# EAGLE board Test_Driver_BLDC (EAGLE 5.06)
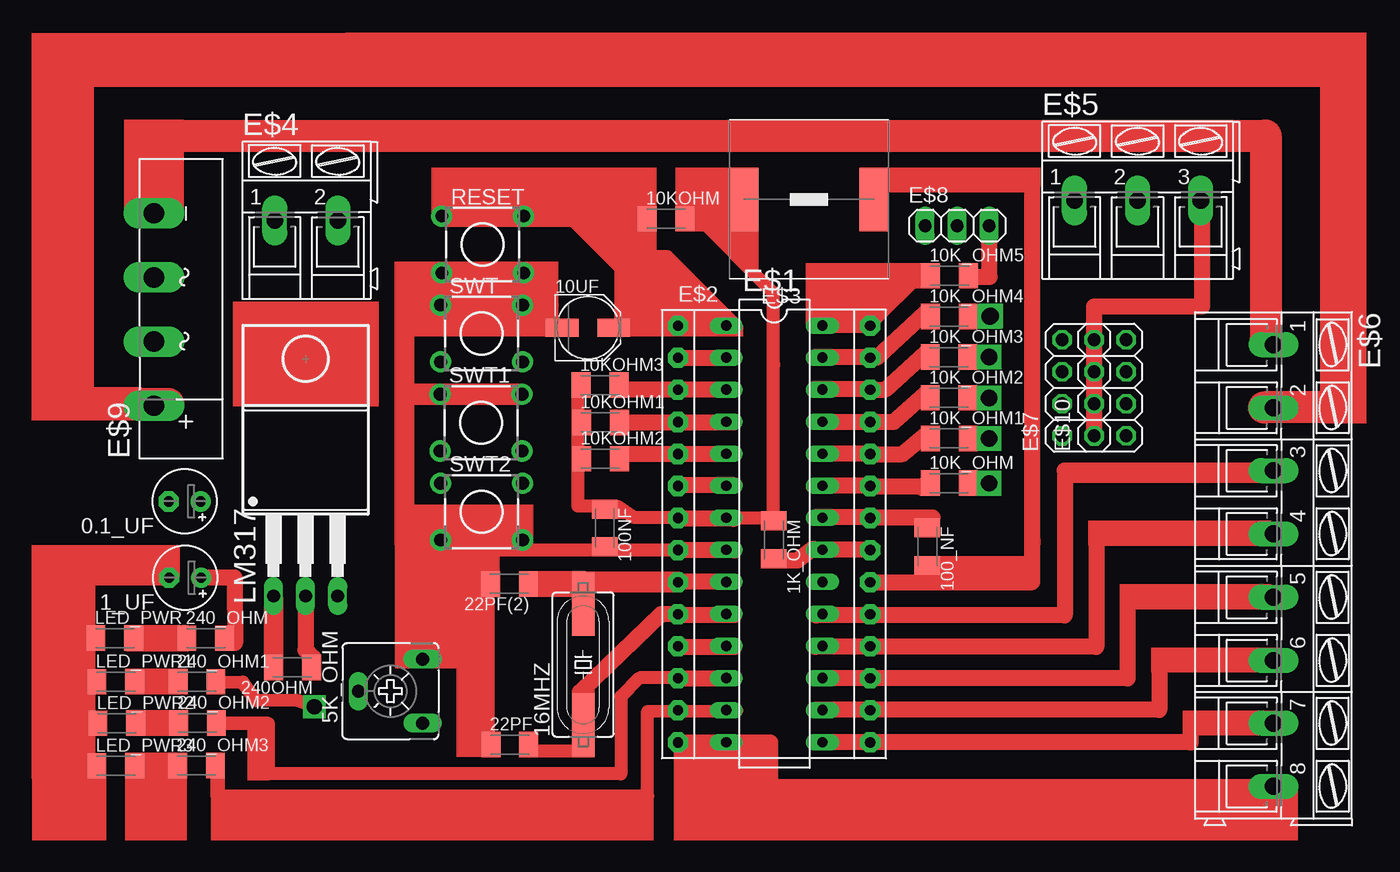
[diagram p0: board, top side]
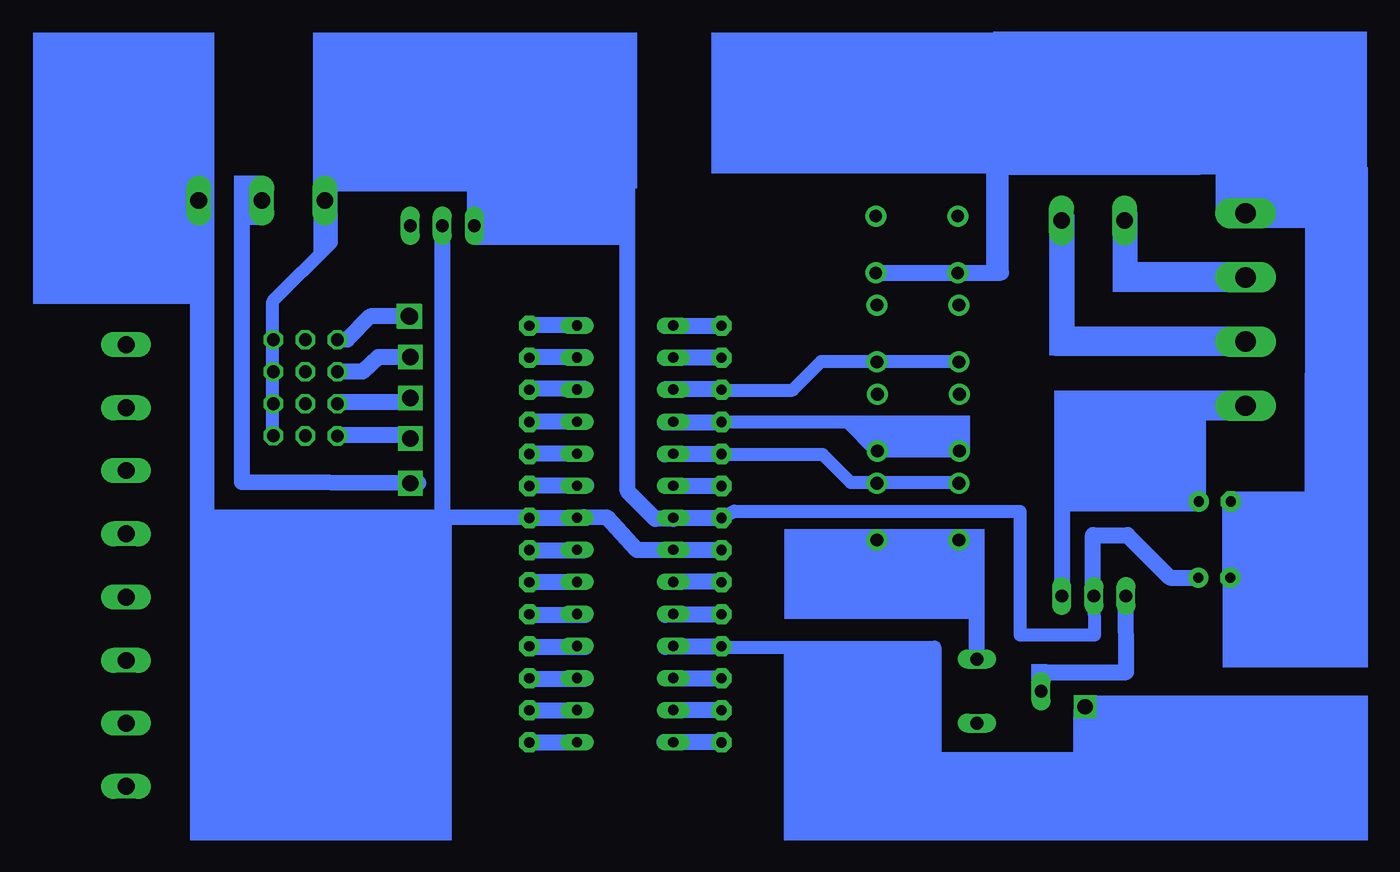
[diagram p1: board, bottom side, seen from below]

No outline drawn. Coordinates in mm, seen from the top.
Copper layers (1*16): Top 0.035mm / dielectric 1.5mm / Bottom 0.035mm
Design rules "default": minimum track width 10mil, minimum drill 24mil, track to track 8mil, track to pad 8mil, pad to pad 8mil, via to via 8mil, smd to smd 8mil, copper to edge 40mil, drill to drill 8mil, minimum pad ring 10mil, minimum via ring 8mil, stop-mask expansion 4mil, vias tented up to drill 0mil, thermal gap 10mil

## Footprints (pad centres in the part's own frame; a part is rotated, then mirrored left to right if it is on the bottom)
E2,5-5 = drill 0.813 pad 1.6 round: + -1.27,0 | drill 0.813 pad 1.6 octagon: - 1.27,0
C1206K = smd 1.5 x 2: 1 -1.5,0; 2 1.5,0
CA6V = drill 1.016 long: A -2.54,-2.54; E 2.54,-2.54; S 0,2.54
PANASONIC_C = smd 2.6 x 1.4: + 2.05,0; - -2.05,0
SM49 = smd 5.08 x 1.778: 1 -4.826,0; 2 4.826,0
DIL28-3 = drill 0.813 long: 1 -16.51,-3.81; 2 -13.97,-3.81; 3 -11.43,-3.81; 4 -8.89,-3.81; 5 -6.35,-3.81; 6 -3.81,-3.81; 7 -1.27,-3.81; 8 1.27,-3.81; 9 3.81,-3.81; 10 6.35,-3.81; 11 8.89,-3.81; 12 11.43,-3.81; 13 13.97,-3.81; 14 16.51,-3.81; 15 16.51,3.81; 16 13.97,3.81; 17 11.43,3.81; 18 8.89,3.81; 19 6.35,3.81; 20 3.81,3.81; 21 1.27,3.81; 22 -1.27,3.81; 23 -3.81,3.81; 24 -6.35,3.81; 25 -8.89,3.81; 26 -11.43,3.81; 27 -13.97,3.81; 28 -16.51,3.81
DIL28 = drill 0.813 pad 1.6 octagon: 1 -16.51,-7.62; 2 -13.97,-7.62; 3 -11.43,-7.62; 4 -8.89,-7.62; 5 -6.35,-7.62; 6 -3.81,-7.62; 7 -1.27,-7.62; 8 1.27,-7.62; 9 3.81,-7.62; 10 6.35,-7.62; 11 8.89,-7.62; 12 11.43,-7.62; 13 13.97,-7.62; 14 16.51,-7.62; 15 16.51,7.62; 16 13.97,7.62; 17 11.43,7.62; 18 8.89,7.62; 19 6.35,7.62; 20 3.81,7.62; 21 1.27,7.62; 22 -1.27,7.62; 23 -3.81,7.62; 24 -6.35,7.62; 25 -8.89,7.62; 26 -11.43,7.62; 27 -13.97,7.62; 28 -16.51,7.62
WE-HC_744318... = smd 2.3 x 5: 1 -5.15,0; 2 5.15,0
AK300/2 = drill 1.321 long: 1 -2.515,0; 2 2.489,0
AK300/3 = drill 1.321 long: 1 -5.004,0; 2 0,0; 3 5.004,0
AK300/8 = drill 1.321 long: 1 -17.501,0; 2 -12.497,0; 3 -7.518,0; 4 -2.515,0; 5 2.515,0; 6 7.518,0; 7 12.497,0; 8 17.501,0
2X04 = drill 1.016 octagon: 1 -3.81,-1.27; 2 -3.81,1.27; 3 -1.27,-1.27; 4 -1.27,1.27; 5 1.27,-1.27; 6 1.27,1.27; 7 3.81,-1.27; 8 3.81,1.27
1X03 = drill 1.016 long: 1 -2.54,0; 2 0,0; 3 2.54,0
KBU = drill 1.6 long: + -7.62,2.54; - 7.62,2.54; AC1 -2.54,2.54; AC2 2.54,2.54
T03B = drill 1.016 long: 1 -2.54,-11.43; 2 0,-11.43; 3 2.54,-11.43
TL1105 = drill 1 pad 1.676 round: 1 -2.25,3.25; 2 2.25,3.25; 3 -2.25,-3.25; 4 2.25,-3.25

## Placement (x,y rotation side)
0.1_UF  [E2,5-5]  12.64,27.35 180 top
1_UF  [E2,5-5]  12.68,21.3 180 top
1K_OHM  [C1206K]  59.35,24.31 270 top
5K_OHM  [CA6V]  28.96,12.31 90 top
10K_OHM  [C1206K]  73.27,28.8 0 top
10K_OHM1  [C1206K]  73.26,32.34 0 top
10K_OHM2  [C1206K]  73.25,35.56 0 top
10K_OHM3  [C1206K]  73.25,38.79 0 top
10K_OHM4  [C1206K]  73.26,42 0 top
10K_OHM5  [C1206K]  73.28,45.24 0 top
10KOHM  [C1206K]  50.81,49.76 0 top
10KOHM1  [C1206K]  45.61,33.61 0 top
10KOHM2  [C1206K]  45.61,30.74 0 top
10KOHM3  [C1206K]  45.57,36.57 0 top
10UF  [PANASONIC_C]  44.61,41.11 0 top
16MHZ  [SM49]  44.24,14.42 90 top
22PF  [C1206K]  38.42,8.08 0 top
22PF(2)  [C1206K]  38.39,20.81 180 top
100_NF  [C1206K]  71.52,23.77 270 top
100NF  [C1206K]  45.95,25.24 270 top
240_OHM  [C1206K]  14.32,16.51 0 top
240_OHM1  [C1206K]  13.62,13.05 0 top
240_OHM2  [C1206K]  13.66,9.79 0 top
240_OHM3  [C1206K]  13.58,6.42 0 top
240OHM  [C1206K]  21.2,14.19 180 top
E$1  [DIL28-3]  59.4,24.78 270 top
E$2  [DIL28]  59.37,24.76 270 top
E$3  [WE-HC_744318...]  62.13,51.28 0 top
E$4  [AK300/2]  22.3,49.62 0 top
E$5  [AK300/3]  88.2,51.21 0 top
E$6  [AK300/8]  98.96,22.27 270 top
E$7  [2X04]  83.48,36.35 90 top
E$8  [1X03]  73.89,49.2 0 top
E$9  [KBU]  12.75,42.56 90 top
E$10  [2X04]  86.02,36.36 90 top
LED_PWR  [C1206K]  7.11,16.52 0 top
LED_PWR1  [C1206K]  7.19,13.06 0 top
LED_PWR2  [C1206K]  7.27,9.76 0 top
LED_PWR3  [C1206K]  7.19,6.39 0 top
LM317  [T03B]  22.23,31.28 0 top
RESET  [TL1105]  36.27,47.71 270 top
SWT  [TL1105]  36.18,40.66 270 top
SWT1  [TL1105]  36.14,33.59 270 top
SWT2  [TL1105]  36.18,26.54 270 top

## Library data of the parts
0.1_UF 1_UF = rcl
1K_OHM 10K_OHM 10K_OHM1-10K_OHM5 10KOHM 10KOHM1-10KOHM3 22PF 22PF(2) 100_NF 100NF 240_OHM 240_OHM1-240_OHM3 240OHM LED_PWR LED_PWR1-LED_PWR3 = resistor
5K_OHM = pot
10UF = ref-packages
16MHZ = crystal
E$1 = atmel
E$2 = burr-brown
E$3 = wuerth-elektronik
E$4-E$6 = con-ptr500
E$7 E$8 E$10 = pinhead
E$9 = rectifier
LM317 = linear
RESET SWT SWT1 SWT2 = switch

## Nets
S$49: E$2.28
S$52: E$2.23

## Tracks (layer width: path | path; a pad name or v marks a point on that pad's centre or on a via)
S$1
  Bottom 1.016: 51.79,31.08 43.74,31.08 41.52,28.86 32.84,28.86
  Bottom 1.27: 56.27,41.25 51.74,41.25 51.74,41.3 | 51.74,38.73 56.27,38.73 | 51.74,36.22 56.27,36.22 | 51.74,33.6 56.27,33.6 | 51.74,31.08 51.79,31.08 56.27,31.08 | 51.69,28.56 56.22,28.56
S$2
  Bottom 1.27: 56.23,26 51.7,26 51.7,26.05 | 51.7,23.48 55.62,23.48 | 55.62,23.48 56.23,23.48 | 51.7,20.97 56.23,20.97 | 51.7,18.35 56.23,18.35 | 51.7,15.83 56.23,15.83 | 51.65,13.31 56.18,13.31 | 51.7,10.79 56.23,10.79 | 51.75,8.27 56.28,8.27 | 55.62,23.48 58.44,23.49 60.84,26.09 63.43,26.05
S$3
  Bottom 1.27: 67.09,23.48 62.56,23.48 | 67.09,20.97 62.56,20.97 | 67.09,18.35 62.56,18.35 | 67.09,15.83 62.56,15.83 | 67.04,13.31 62.51,13.31 | 67.09,10.79 62.56,10.79 | 67.14,8.27 62.61,8.27
S$4
  Bottom 1.27: 67.07,41.3 62.54,41.3 62.54,41.35 | 62.54,38.78 67.07,38.78 | 62.54,36.27 67.07,36.27 | 62.54,33.65 67.07,33.65 | 62.54,31.13 67.07,31.13 | 62.49,28.61 67.02,28.61
S$5
  Bottom 1.27: 67.03,26.05 62.5,26.05 62.68,26.1
S$6
  Top 1.27: 51.77,18.41 50.42,18.41 43.98,12.23
S$7
  Top 1.016: 43.95,7.55 40.08,7.55
S$8
  Top 1.016: 51.79,23.48 36.69,23.48 36.69,8.18
S$9
  Top 1.016: 51.74,26.05 48.27,26.06 46.88,26.99
S$10
  Top 1.016: 55.63,26.05 59.33,26.05 59.33,38.24
S$11
  Top 1.016: 46.71,41.3 56.24,41.26
S$12
  Top 1.27: 51.74,36.21 47.79,36.21 | 51.77,33.6 47.82,33.6 | 51.74,31.09 47.79,31.09
S$13
  Top 1.016: 46.32,26.97 43.83,26.97 43.83,36.8
S$14
  Top 1.016: 41.78,41.12 41.78,42.9 29.83,42.93 29.83,23.48 37.13,23.48
S$15
  Bottom 1.016: 51.74,36.17 46.11,36.17 43.84,38.44 32.84,38.44 32.79,38.39
S$16
  Top 1.016: 39.45,35.82 29.88,35.82
S$17
  Top 1.016: 43.1,49.94 51.79,41.25 | 43.22,50.29 51.91,41.6
  Top 1.676: 33.04,49.94 43.1,49.94
S$18
  Bottom 1.016: 51.74,33.65 41.77,33.65 39.5,31.38 32.79,31.38
S$19
  Top 1.27: 79.87,24.06 79.87,52.46 67.28,52.43
S$20
  Top 1.016: 59.34,38.11 59.34,43.86 52.91,50.29
S$21
  Top 1.016: 56.39,41.29 50.92,46.76 49.66,46.76
S$22
  Bottom 1.016: 51.83,26.02 50.75,26.58 28.08,26.55 28.08,16.75
S$23
  Bottom 1.016: 22.23,19.89 22.19,16.75 27.95,16.75
S$24
  Bottom 1.27: 10.25,34.77 24.76,34.78 24.76,19.46
S$25
  Bottom 1.27: 39.43,45.46 29.59,45.49 29.59,53.87 13.93,53.87
S$26
  Top 1.27: 22.23,19.77 22.23,15.58 22.84,14.97
S$27
  Bottom 1.27: 39.39,24.31 31.53,24.31 31.53,14.79
S$28
  Bottom 1.27: 26.44,13.82 19.67,13.82 19.7,19.95
S$29
  Bottom 1.27: 10.18,50.12 10.18,53.86 15.17,53.86
S$30
  Bottom 1.27: 10.18,45.12 19.76,45.12 19.76,49.71
S$31
  Bottom 1.27: 10.18,39.91 24.76,39.91 24.76,49.61
S$32
  Bottom 1.27: 22.31,19.98 22.31,24.68 19.56,24.68 16.19,21.31 14.05,21.31
S$33
  Bottom 1.27: 13.95,27.34 13.95,34.49
S$34
  Bottom 1.27: 11.97,53.85 4.88,53.85 4.92,21.23 11.4,21.23 11.4,27.44
S$35
  Top 1.27: 67.07,20.95 79.84,20.95 79.86,24.27
S$36
  Top 1.27: 66.97,26.09 71.93,26.09
S$37
  Top 1.27: 13.97,21.33 16.6,21.33 16.63,16.12
S$38
  Top 1.27: 11.43,21.28 4.91,21.28 4.91,6.01
S$39
  Bottom 1.27: 66.98,26.04 93.26,26.1 93.26,51.27
S$40
  Top 1.27: 67,31.09 69.56,31.09 71.48,32.71
S$41
  Top 1.27: 67,33.65 68.87,33.65 71.43,35.91
S$42  (via drill 1.3)
  other vias: 76.43,28.79
S$43  (via drill 1.3)
  other vias: 76.43,32.34
S$44  (via drill 1.3)
  other vias: 76.43,35.56 76.44,38.79 76.46,42.01 76.55,42.04
S$45
  Bottom 1.27: 75.8,28.8 89.76,28.88 89.76,51.29
S$46
  Bottom 1.27: 55.59,25.97 57.01,25.97 59.2,28.16 59.2,52.53 83.33,52.53
S$47
  Top 1.27: 66.99,36.21 68.2,36.21 71.45,39.16
S$48
  Top 1.27: 67,38.76 67.55,38.76 71.43,42.34
S$49
  Top 1.27: E$2.28 66.99,41.56 71.04,45.61
S$50
  Top 1.27: 59.47,22.68 61.23,22.68 62.39,23.56
S$51
  Top 1.27: 67.04,23.53 62.56,23.53 62.56,23.56 | 67.08,26.08 62.6,26.08 | 67.01,28.59 62.53,28.59 | 67.07,31.13 62.59,31.13 | 67.03,33.64 62.55,33.64 | 67.07,36.25 62.59,36.25 | 67,38.77 62.52,38.77 | 67.04,41.31 62.56,41.31 | 56.12,25.97 51.64,25.97 | 56.19,31.09 51.71,31.09 | 56.16,33.6 51.68,33.6 | 56.19,36.21 51.71,36.21 | 56.23,23.47 51.75,23.47 | 56.23,20.97 51.75,20.97 | 56.2,18.34 51.72,18.34 | 56.23,15.81 51.75,15.81 | 56.16,13.31 51.68,13.31 | 56.24,28.63 51.76,28.63 | 56.16,38.71 51.68,38.71
S$52
  Top 1.27: E$2.23 71.13,28.57 71.13,28.43
S$53
  Top 2.54: 10.2,50.28 10.2,56.34 98.34,56.34 98.34,40.1
S$54
  Top 2.54: 11.34,35.07 4.21,35.11 4.21,61.49 103.91,61.49 103.92,34.8 98.23,34.8
S$55
  Top 1.27: 99.01,29.78 82.42,29.78 82.42,18.32 62.71,18.32
S$56
  Top 1.27: 99.01,24.71 84.91,24.71 84.91,15.82 62.63,15.82
S$57
  Top 1.27: 98.93,19.72 87.4,19.72 87.4,13.32 62.55,13.32
S$58
  Top 1.27: 98.85,14.73 89.9,14.73 89.9,10.83 62.63,10.83
S$59
  Top 1.27: 98.93,9.74 92.39,9.74 92.39,8.25 62.71,8.25
S$60
  Top 1.27: 51.73,8.25 59.05,8.25 59.05,4.74 99.24,4.74
S$61
  Top 1.27: 84.76,32.59 84.76,42.81 93.32,42.81 93.32,51.63
S$62
  Top 1.27: 74.9,45.15 76.46,45.15 76.46,49.29
S$63
  Bottom 1.27: 76.44,42.01 79.6,42.01 81.43,40.18 82.27,40.18
S$64
  Bottom 1.27: 76.48,38.78 78.97,38.78 80.22,37.64 82.23,37.64
S$65
  Bottom 1.27: 76.48,32.31 76.75,32.58 82.25,32.58
S$66
  Bottom 1.27: 76.48,35.55 76.84,35.19 82.24,35.19
S$67
  Top 1.016: 51.86,13.36 48.72,13.36 47.23,11.87 47.23,5.75 19.3,5.75 19.3,9.75 15.77,9.75
S$68  (via drill 1.2)
  other vias: 22.93,11.07
S$69
  Top 1.016: 22.85,11.03 21.55,11.58 18.3,11.57 17.24,13.02 14.93,12.99
S$70
  Top 1.016: 15.22,6.69 15.22,4.01 49.35,4.02 49.35,10.7 56.41,10.77
S$71
  Top 1.016: 18.5,9.74 15.44,9.74 15.36,9.7
S$72
  Bottom 1.016: 51.77,15.81 34.84,15.81 34.84,6.99 22.93,6.99 22.93,11.11
S$73
  Bottom 1.27: 73.97,49.29 73.89,49.29 73.89,26.09
S$74
  Bottom 1.27: 71.31,49.13 71.31,52.49
S$75
  Bottom 1.016: 87.33,32.52 87.33,43.2 82.68,47.86 82.68,51.89
(copper drawn outside any net)
  shapes: Bottom area x33, Top area x75